# Altium PCB Mako DSP R1.6.PcbDoc (part 2 of 2)
Units mil, origin at the board's own origin, x right, y up, seen from the top; angles counter-clockwise.
Board outline 4440 x 2100 mil, 4 copper layers (Top Layer, GND, Power, Bottom Layer); 190 components, 158 nets, 691 pads, 287 vias.
Unrouted connection lines stored in the file: 35.
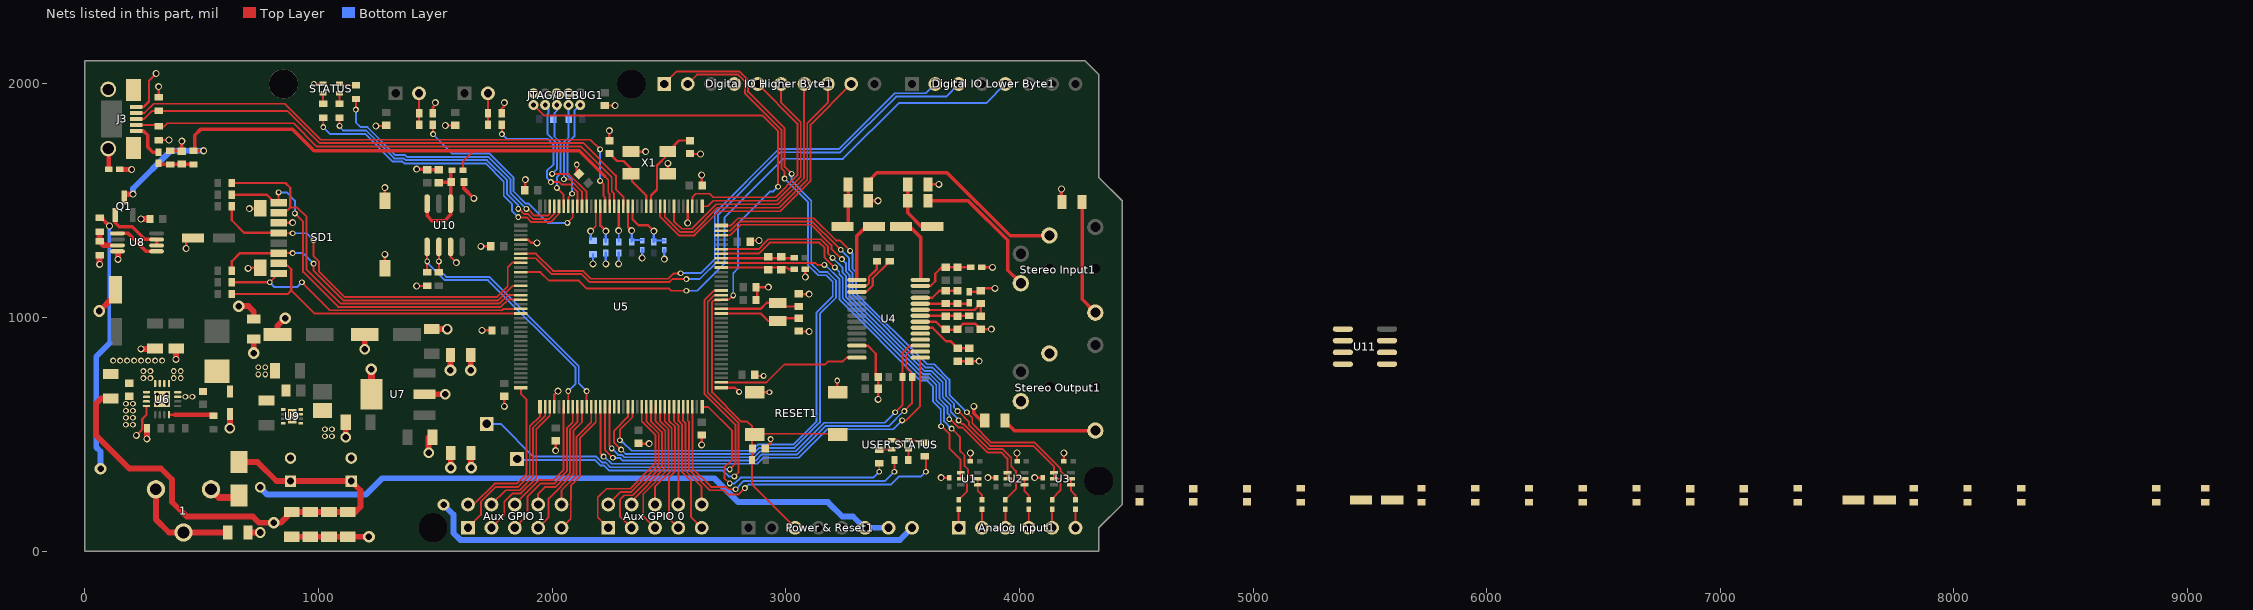
[diagram p4: the nets of this part, all layers, seen from the top]

## Via types
v1: diameter 25, hole 15, Top Layer to Bottom Layer, 131 vias
v2: diameter 30, hole 20, Top Layer to Bottom Layer, 121 vias
v3: diameter 50, hole 28, Top Layer to Bottom Layer, 23 vias
v4: diameter 45, hole 28, Top Layer to Bottom Layer, 10 vias
v5: diameter 19.68, hole 7.87, Top Layer to Bottom Layer, 2 vias

## Nets (pads, with @x,y where several pads share a name; then routed paths per layer and width w, separated by ;. In a path a pad name is that pad's centre, name@x,y a point inside that pad or via, vN(x,y) a via of type N, cw(c..) or ccw(c..) an arc to the next point about the centre after c; other vN are vias at no path point) (continued)
GND: "Digital IO Higher Byte1.4" "Power & Reset1.6" "Power & Reset1.7" "USER STATUS.1" C1.1 C2.1 C3.1 C4.1 C5.1 C6.1 C7.1 C8.1 C9.1 C12.1 C13.1 C16.1 C17.1 C18.1 C19.1 C21.1 C23.1 C24.1 C25.1 C27.1 C28.1 C29.1 C30.2 C31.1 C32.2 C35.1 C36.1 C37.1 C38.1 C39.1 C40.1 C41.1 C42.1 C43.1 C44.1 C45.1 C46.1 C47.1 C48.1 C49.1 C50.1 C51.2 C52.2 C53.2 C54.1 C55.1 C56.2 C57.2 C58.2 C59.1 C60.1 C61.2 C62.1 C63.1 C64.1 C65.2 C66.1 C67.1 C68.1 C71.1 C72.1 C73.1 C74.1 C75.1 C78.1 C79.1 D1.1 FB3.2 FB4.2 FB6.1 FB8.1 FB8.2 FB9.1 FB9.2 FB11.1 FB11.2 FB12.2 FB13.2 FB14.2 FB15.2 FB16.1 FB17.2 J3.5 JTAG/DEBUG1.3 JTAG/DEBUG1.5 JTAG/DEBUG1.9 pad.@850,2000 R8.1 R11.1 R14.1 R16.1 R20.1 R29.2 R31.2 R32.2 R33.2 R47.1 R51.1 R52.2 R57.1 RESET1.2 SD1.6 SD1.9 SD1.10 SD1.11 SD1.12 STATUS.1 U4.12 U4.21 U5.4 U5.40 U5.76 U5.109 U6.4 U6.14 U6.15 U6.17 U7.2 U7.4 U8.4 U9.1 U9.4 U9.5 U9.9 U10.3 U11.4 X1.2 X1.4 | length 8989.1
  Top Layer w10: J3.5@219.04,1901.18 250.22,1901.18 274.04,1925 274.04,2013.78 v2(305,2044.74) ; v2(220.25,496) 245.25,521 245.25,566 263.32,584.07 U6.4@263.32,621.47 ; R32.2@315.57,1943.54 v2(315.57,1988.46) ; R33.2@315.83,1759.74 v2(360,1759.74) ; C68.1@413.03,1714.27 C68.1@415,1712.3 ; v2(433.53,1295.92) 433.53,1320.92 ; v2(699,1210.92) 701.05,1212.97 SD1.11@750.54,1212.97 ; v2(704,1465.92) 747.58,1465.92 SD1.12@750.54,1468.87 ; v2(889,1405.92) SD1.6@829.32,1405.92 ; v1(980,2000) STATUS.1@1019.13,2000 ; v2(1245,1820) C27.1@1287.56,1820 ; SD1.9@1284,1210.92 v2@1284,1271 ; SD1.10@1284,1500.37 v2(1284,1555.92) ; v2(1420,1135) R47.1@1464.53,1135 ; R14.1@1489.53,1875 1489.53,1899.53 1500,1910 v2(1500,1920) ; v2(1542.44,1822.44) C28.1@1585,1822.44 ; U10.3@1565,1302.48 1565,1260 v2(1590,1235) ; v2(1695,1305) C43.1@1737.44,1305 ; v2(1700,945) C42.1@1742.44,945 ; R16.1@1784.53,1875 1784.53,1894.53 1795,1905 v2(1795,1920) ; v2(1795,620) C41.1@1795,662.44 ; U5.40@1865.87,1332.48 1897.52,1332.48 1910,1320 v2(1935,1320) ; C44.1@1885,1547.44 v2(1885,1590) ; U5.76@2009.57,617.91 2009.57,669.57 v2(2025,685) ; v2(2015,430) C40.1@2015,472.44 ; v1(2105,1655) 2105,1625 C46.1@2115.51,1614.49 ; C32.2@2225,1907.44 v2(2270,1907.44) ; C30.2@2245,1757.56 v2(2245,1800) ; X1.2@2337.52,1710 v2(2400,1710) ; C39.1@2372.44,460 v2(2415,460) ; X1.4@2495,1615.51 v2(2495,1660) ; v2@2580.43,1405 U5.4@2580.43,1476.18 ; C31.1@2592.56,1700 v2(2635,1700) ; v2(2640,455) C38.1@2640,507.36 ; C45.1@2640,1567.56 v2(2640,1610) ; U5.109@2724.13,700.2 2781.85,700.2 v1(2800,682.05) ; C47.1@2852.56,1330 v2(2885,1330) ; RESET1.2@2868.39,680 v1(2930,680) ; C37.1@2869.69,750 v1(2905,750) ; C49.1@2877.56,1075 2877.56,1130 v2(2925,1130) ; C29.1@2912.56,440 2935,462.44 v1(2935,480) ; C35.1@3055,940 v2(3100,940) ; C36.1@3060,1102.56 3062.56,1100 v2(3100,1100) ; v2(3083.62,1173.43) FB6.1@3083.62,1207.05 ; RESET1.2@3220,682.72 v1(3220,730) ; U4.12@3304.17,879.84 3350.47,879.84 3385.16,845.16 3385.16,755.28 C8.1@3395.12,745.31 C9.1@3395.12,695.31 v2@3395.12,650.2 ; 3454.13,475 3480,475 3490,465 v1(3490,455) ; U4.21@3575.83,982.2 3642.8,982.2 3677.44,947.56 3727.44,947.56 C13.1@3735,940 ; C23.1@3613.31,1570 v2(3655,1570) ; v2(3665,315) 3699.69,315 C2.1@3700,314.68 ; C18.1@3735,813.44 C19.1@3785,813.44 v2(3827.56,813.44) ; C13.1@3735,950 3757.81,972.81 3812.19,972.81 C17.1@3835,950 v2(3880,950) ; FB17.2@3785,1111.18 3831.06,1111.18 C16.1@3835,1115.12 3845.04,1125.16 v2(3895.16,1125.16) ; v2(3790,420) 3790,385.32 C1.1@3790.31,385 ; FB13.2@3838.78,1215.16 v2(3885.16,1215.16) ; v2(3865,315) 3899.69,315 C4.1@3900,314.68 ; v2(3990,420) 3990,385.32 C3.1@3990.31,385 ; v2(4065,315) 4099.69,315 C6.1@4100,314.68 ; FB14.2@4180,1496.69 FB14.2@4181.69,1495 ; v2(4190,420) 4190,385.32 C5.1@4190.31,385 ; SD1.6@829.28,1405.88 SD1.6@829.32,1405.92
  Top Layer w15: R29.2@365,1714.27 C68.1@413.03,1714.27 ; C68.1@415,1712.3 v2(415,1754.74) ; v2(1420,1635) C62.1@1462.56,1635 ; C62.1@1465,1632.56 C63.1@1515,1632.56 ; C64.1@1622.56,1580 1622.56,1552.44 v2(1665,1510) ; C21.1@3353.31,1500 v2(3395,1500) ; v2(3805,620) 3805,590 3835,560 FB15.2@3851.69,560 ; FB14.2@4180,1496.69 v2(4180,1550)
  Top Layer w20: FB12.2@149.2,1634.02 v2(200,1634.01)
  Top Layer w25: v3(62,1028) 119,1085 C66.1@119,1119.55 ; v2(63,1228) R20.1@63,1267.47 ; v2@141,1249.94 U8.4@141,1278 ; v2(240,1422) C65.2@278.44,1422 ; v2(240.25,866) 298.4,866 C53.2@300.25,867.85 ; v2(265.25,481) 265.72,481.47 R11.1@265.72,526 ; v2(390.25,821) C50.1@390.25,867.85 ; v4(621,527) D1.1@621,586.77 ; v3(658,1049) 700,1049 723,1026 FB11.2@723,994.31 ; FB16.1@698.31,80 v4(750,80) ; v3(723,848) FB11.1@723,907.69 ; C61.2@788,927 C61.2@817.45,927 ; C61.2@824.45,928 824.45,964.45 v3(857,997) ; C74.1@885,61.85 C7.1@965,61.85 C72.1@1045,61.85 C73.1@1125,61.85 v3(1215.85,61.85) ; v4(1116.3,488.4) C67.1@1116.3,552 ; C58.2@1197.45,925 1198,924.45 v4(1198,865) ; v3@1225.83,778.83 v3(1226,779) ; U7.2@1454.17,672 v4(1542.45,672) ; C56.2@1470.7,487 1471,486.7 v4(1471,422) ; C57.2@1484,951.15 1550.85,951.15 v4(1551,951) ; v3(1564.69,775) FB9.2@1564.69,840 ; v3(1566,357) FB8.2@1566,419.69 ; v3(1651.31,774) FB9.1@1651.31,840 ; FB8.1@1652.31,420 1653,419.31 v3(1653,357)
  Top Layer w30: U7.4@1225.83,679 v3@1225.83,778.83
  Bottom Layer w10: v2(2175,1230) R8.1@2175,1270.47 ; v2(2230,1230) FB3.2@2230,1277.01 ; FB4.2@2283.62,1277.05 FB4.2@2285,1278.43 ; v2(2285,1230) FB4.2@2285,1276.38 ; v2(2385,1255) C25.1@2385,1292.36 ; v2(2480,1250) C24.1@2480,1290.32
  Bottom Layer w25: v4(750,273) 781,242 1202.32,242 1272.32,312 2694.16,312 2796.13,210.03 3179.97,210.03 3241.97,148.03 3288.03,148.03 3336.06,100 3340,100 3440,100
  other v1: 1027,492 1057,492 1027,522 1057,522 310.25,631 350.25,631 310.25,671 350.25,671 742,757 772,757 742,787 772,787 120.25,816 150.25,816 180.25,816 210.25,816 240.25,816 270.25,816 300.25,816 330.25,816
  other v2: 3395.16,650.16 142,1249 1283.53,1270.92 2580,1405
  other v5: 887,561.25 887,592.75
I2C_CLK: R1.1 U4.17 U5.88 | length 1846.7
  Top Layer w8: U5.88@2245.79,617.91 2245.79,449.21 v1(2255,440) ; v1(3467.72,595) 3499.69,626.96 R1.1@3499.69,745.16 3499.69,849.68 3529.84,879.84 U4.17@3575.83,879.84
  Bottom Layer w8: v1(2255,440) 2282.5,412.5 2297.7,412.5 2308.2,402 2865.58,402 2891.58,428 3043,428 3165,550 3422.72,550 v1(3467.72,595)
I2C_DATA: R2.1 U4.16 U5.87 | length 1890.4
  Top Layer w8: U5.87@2226.1,617.91 2226.1,433.9 v1(2260,400) ; v1(3507.72,600) 3540.16,632.44 R2.1@3540.16,745.16 ; R2.1@3535.16,755.16 3535.16,765.16 3515.69,784.63 3515.69,840.68 3529.25,854.25 U4.16@3575.83,854.25
  Bottom Layer w8: v1(2260,400) 2261.5,398.5 2291.9,398.5 2302.4,388 2871.38,388 2897.38,414 3048.8,414 3170.8,536 3441.9,536 3505.9,600 v1(3507.72,600)
LATCH_ENABLE: U4.15 U5.86 | length 1897.3
  Top Layer w8: U5.86@2206.42,617.91 2206.42,418.58 v1(2220,405) ; v1(3497.72,560) 3515,560 3575.16,620.16 3575.16,827.99 U4.15@3575.83,828.66
  Bottom Layer w8: v1(2220,405) 2223.18,405 2254.18,374 2877.18,374 2903.18,400 3054.6,400 3176.6,522 3459.72,522 v1(3497.72,560)
MODE: U4.14 U5.110 | length 633.3
  Top Layer w8: U5.110@2715,722.05 2917.05,722.05 2994.05,799.05 3169.05,799.05 3182.5,812.5 3244.32,812.5 3260.48,828.66 U4.14@3304.17,828.66
Net1_1: 1.1 D2.2 | length 139.9
  Top Layer w8: D2.2@646.85,230 D2.2@660,243.15
  Top Layer w30: 1.1@540,265 575,230 D2.2@646.85,230
Net1_2: 1.2 1.3 FB16.2 | length 460
  Top Layer w25: 1.2@303.78,265 303.78,136.22 360.04,79.96 1.3@421.89,79.96 FB16.2@611.69,80 FB16.2@611.69,80
"NetAnalog Input1_1": "Analog Input1.1" R34.1 | length 80.3
  Top Layer w8: 3740,100 R34.1@3740,180.32
"NetAnalog Input1_2": "Analog Input1.2" R35.1 | length 80.3
  Top Layer w8: 3840,100 R35.1@3840,180.32
"NetAnalog Input1_3": "Analog Input1.3" R36.1 | length 80.3
  Top Layer w8: 3940,100 R36.1@3940,180.32
"NetAnalog Input1_4": "Analog Input1.4" R37.1 | length 80.3
  Top Layer w8: 4040,100 R37.1@4040,180.32
"NetAnalog Input1_5": "Analog Input1.5" R38.1 | length 80.3
  Top Layer w8: 4140,100 R38.1@4140,180.32
"NetAnalog Input1_6": "Analog Input1.6" R39.1 | length 80.3
  Top Layer w8: 4240,100 R39.1@4240,180.32
"NetAux GPIO 0_1": "Aux GPIO 0.1" U5.95 | length 722.2
  Top Layer w8: 2240,100 2195,145 2195,230 2232.53,267.53 2333.53,267.53 2442,375.99 2442,498 2383.58,556.42 U5.95@2383.58,617.91
"NetAux GPIO 0_2": "Aux GPIO 0.2" U5.96 | length 556.1
  Top Layer w8: 2240,200 2293.53,253.53 2339.33,253.53 2456,370.2 2456,503.8 2403.27,556.53 U5.96@2403.27,617.91
"NetAux GPIO 0_3": "Aux GPIO 0.3" U5.97 | length 653.5
  Top Layer w8: 2340,100 2290,150 2290,220 2309.53,239.53 2345.13,239.53 2470,364.4 2470,509.6 2423,556.6 U5.97@2422.95,617.91 U5.97@2422.95,617.91
"NetAux GPIO 0_4": "Aux GPIO 0.4" U5.98 | length 494.7
  Top Layer w8: 2340,200 2340,214.6 2484,358.6 2484,515.4 2442.64,556.76 U5.98@2442.64,617.91
"NetAux GPIO 0_5": "Aux GPIO 0.5" U5.99 | length 598.1
  Top Layer w8: 2440,100 2390,150 2390,244.8 2498,352.8 2498,521.2 2462.32,556.87 U5.99@2462.32,617.91
"NetAux GPIO 0_6": "Aux GPIO 0.6" U5.100 | length 460.2
  Top Layer w8: 2440,200 2440,275 2512,347 2512,526.99 2482.01,556.99 U5.100@2482.01,617.91
"NetAux GPIO 0_7": "Aux GPIO 0.7" U5.101 | length 556
  Top Layer w8: U5.101@2500,617.91 2500,558.79 2526,532.79 2526,341.2 2500,315.2 2500,140 2540,100
"NetAux GPIO 0_8": "Aux GPIO 0.8" U5.102 | length 425.6
  Top Layer w8: U5.102@2521.38,617.91 2521.38,557.21 2540,538.59 2540,200
"NetAux GPIO 0_9": "Aux GPIO 0.9" U5.103 | length 558.9
  Top Layer w8: U5.103@2541.06,617.91 2541.06,557.33 2555,543.39 2555,340 2595,300 2595,145 2640,100
"NetAux GPIO 0_10": "Aux GPIO 0.10" U5.104 | length 450.7
  Top Layer w8: U5.104@2560.75,617.91 2560.75,557.44 2570,548.19 2570,345.4 2640,275.4 2640,200
"NetAux GPIO 1_1": "Aux GPIO 1.1" U5.73 | length 701.6
  Top Layer w8: 1640,100 1695,155 1695,210.9 1759.1,275 1854.8,275 1904,324.2 1904,534 1948.15,578.15 U5.73@1948.15,617.91
"NetAux GPIO 1_2": "Aux GPIO 1.2" U5.72 | length 684
  Top Layer w8: 1640,200 1664.3,200 1753.3,289 1849,289 1890,330 1890,650 1865.87,674.13 U5.72@1865.87,700.2
"NetAux GPIO 1_3": "Aux GPIO 1.3" U5.75 | length 642.1
  Top Layer w8: 1740,100 1795,155 1795,210.9 1831.1,247 1866.4,247 1932,312.6 1932,522.4 1989.88,580.28 U5.75@1989.88,617.91
"NetAux GPIO 1_4": "Aux GPIO 1.4" U5.74 | length 548.2
  Top Layer w8: 1740,200 1801,261 1860.6,261 1918,318.4 1918,528.2 1970.2,580.4 U5.74@1970.2,617.91
"NetAux GPIO 1_5": "Aux GPIO 1.5" U5.80 | length 656.4
  Top Layer w8: 1840,100 1895,155 1895,235.2 1948.8,289 2009.6,289 2062.94,342.33 2062.94,527.13 2088.31,552.5 U5.80@2088.31,617.91
"NetAux GPIO 1_6": "Aux GPIO 1.6" U5.78 | length 540.5
  Top Layer w8: 1840,200 1840,200.8 1944.2,305 2005.8,305 2048.94,348.13 U5.78@2048.94,617.91
"NetAux GPIO 1_7": "Aux GPIO 1.7" U5.82 | length 595.7
  Top Layer w8: 1940,100 1985,145 1985,224.8 2090.94,330.74 2090.94,515.53 2127.68,552.28 U5.82@2127.68,617.91
"NetAux GPIO 1_8": "Aux GPIO 1.8" U5.81 | length 514.1
  Top Layer w8: 1940,200 1940,245 1970,275 2015.4,275 2076.94,336.53 2076.94,521.33 2107.99,552.39 U5.81@2107.99,617.91
"NetAux GPIO 1_9": "Aux GPIO 1.9" U5.85 | length 578.7
  Top Layer w8: 2040,100 2079.53,139.53 2079.53,219.53 2080,220 2080,280.2 2118.94,319.14 2118.94,484.14 2186.73,551.93 U5.85@2186.73,617.91
"NetAux GPIO 1_10": "Aux GPIO 1.10" U5.84 | length 470.5
  Top Layer w8: 2040,200 2040,260 2104.94,324.94 2104.94,489.94 2167.05,552.05 U5.84@2167.05,617.91
NetC10_1: C10.1 C11.1 FB13.1 U4.27 | length 260.6
  Top Layer w10: U4.27@3575.83,1135.75 3620.56,1135.75 3640,1155.19 3640,1187.56 C10.1@3675,1222.56 ; C10.1@3685,1215.12 3685.04,1215.16 FB13.1@3791.54,1215.16
NetC12_2: C12.2 C13.2 R3.1 U4.22 | length 209.5
  Top Layer w10: U4.22@3575.83,1007.8 3784.29,1007.8 R3.1@3785,1007.09
NetC14_1: C14.1 C15.1 FB17.1 U4.24 | length 209.2
  Top Layer w10: U4.24@3575.83,1058.98 FB17.1@3785,1058.98
NetC14_2: C14.2 C15.2 U4.25 | length 171.8
  Top Layer w10: U4.25@3575.83,1084.57 3627.01,1084.57 3657.56,1115.12 C15.2@3735,1115.12
NetC16_2: C16.2 C17.2 U4.23 | length 325.8
  Top Layer w10: U4.23@3575.83,1033.39 3576.65,1032.56 3807.56,1032.56 C16.2@3835,1060 C17.2@3835,1005.12
NetC18_2: C18.2 C19.2 U4.20 | length 245.6
  Top Layer w10: U4.20@3575.83,956.61 3628.39,956.61 3687,898 3706.56,898 C18.2@3736,868.56 C19.2@3785,868.56
NetC20_1: C20.1 U4.1 | length 277.5
  Top Layer w15: U4.1@3304.17,1161.34 3304.17,1349.17 3345,1390 C20.1@3376.93,1390
NetC20_2: C20.2 C21.2 R4.1 | length 181.5
  Top Layer w15: C20.2@3263.07,1390 3266.69,1393.62 C21.2@3266.69,1500 R4.1@3266.69,1570
NetC22_1: C22.1 U4.28 | length 286.9
  Top Layer w15: C22.1@3493.07,1390 3530,1390 3578.66,1341.34 3578.66,1164.17 U4.28@3575.83,1161.34
NetC22_2: C22.2 C23.2 R5.1 | length 251.1
  Top Layer w15: C23.2@3521.69,1570 3521.69,1448.31 3580,1390 C22.2@3626.93,1390
NetC24_2: C24.2 FB2.2 U5.16 | length 261.1
  Top Layer w10: U5.16@2344.21,1476.18 2344.21,1420.79 2370,1395 2410,1395 v2(2435,1370)
  Bottom Layer w10: v2(2435,1370) FB2.2@2435,1323.62 2441.06,1329.69 C24.2@2480,1329.69
NetC25_2: C25.2 FB1.2 U5.17 | length 195.9
  Top Layer w10: U5.17@2324.53,1476.18 2324.53,1387.52 v2(2340,1372.05)
  Bottom Layer w10: FB1.2@2340,1325.67 v2(2340,1372.05) ; FB1.2@2346.06,1331.73 C25.2@2385,1331.73
NetC30_1: C30.1 U5.13 X1.3 | length 306.3
  Top Layer w10: C30.1@2245,1702.44 2277.44,1670 2305,1670 2337.52,1637.48 X1.3@2337.52,1615.51 ; X1.3@2341.54,1615.51 2341.54,1583.46 2403.27,1521.73 U5.13@2403.27,1476.18
NetC31_2: C31.2 U5.12 X1.1 | length 378.4
  Top Layer w10: U5.12@2422.95,1476.18 2422.95,1522.95 2448.57,1548.57 2448.57,1650.34 2495,1696.77 X1.1@2495,1710 2542.56,1757.56 C31.2@2590,1757.56
NetC63_2: C63.2 C64.2 FB7.1 U10.6 U10.8 | length 417.3
  Top Layer w8: FB7.1@1565,1623.62 FB7.1@1571.38,1630
  Top Layer w15: U10.8@1465,1487.52 1465,1435 1485,1415 1540,1415 1565,1440 U10.6@1565,1487.52 C64.2@1565,1580 ; C63.2@1515,1577.44 1517.56,1580 C64.2@1565,1580 ; FB7.1@1565,1623.62 C64.2@1565,1580 ; C64.2@1567.44,1580 C64.2@1565,1580
NetC68_2: C68.2 FB10.1 R27.1 R29.1 | length 152.4
  Top Layer w10: FB10.1@315,1661.12 FB10.1@320.91,1655.21
  Top Layer w15: FB10.1@320.91,1655.21 R29.1@365,1655.21 R27.1@465,1655.21
NetC69_1: C69.1 U4.19 | length 1.4
  Top Layer w15: U4.19@3575.83,931.02 U4.19@3576.85,930
NetC69_2: C69.2 R49.2 R51.2
NetC70_1: C70.1 R46.2 R48.1 U11.1
NetC70_2: C70.2 R49.1 R50.2
NetC75_2: C75.2 R50.1 U11.3
NetC76_1: C76.1 U4.18
NetC76_2: C76.2 R55.2 R57.2
NetC77_1: C77.1 R53.2 R54.1 U11.7
NetC77_2: C77.2 R55.1 R56.2
NetC78_2: C78.2 R56.1 U11.5
NetDBGEN1_2: DBGEN1.2 R15.2 R16.2 | length 134.5
  Top Layer w8: R15.2@1725,1825.47 DBGEN1.2@1725,1960
NetFB3_1: FB3.1 U5.23 | length 162.3
  Top Layer w10: U5.23@2206.42,1476.18 2206.42,1393.58 v2(2230,1370)
  Bottom Layer w10: FB3.1@2230,1323.62 v2(2230,1370)
NetFB4_1: FB4.1 U5.19 | length 150.6
  Top Layer w8: U5.19@2285,1476.02 U5.19@2285.16,1476.18
  Top Layer w10: v2(2285,1372.05) U5.19@2285,1476.02
  Bottom Layer w8: FB4.1@2285,1325.67 v2(2285,1372.05)
NetFB7_2: FB7.2 Q1.3 R27.2 U5.21 | length 2625.7
  Top Layer w8: FB7.2@1618.62,1630 1618.62,1668.89 1664,1714.27 ; 2225,1605 2240,1590 2240,1535 2245.79,1529.21 U5.21@2245.79,1476.18
  Top Layer w15: R27.2@465,1714.27 R27.2@470,1714.27 ; v2(508,1714) 507.73,1714.27 R27.2@470,1714.27 ; 2225,1605 2115.73,1714.27 1664,1714.27 980.73,1714.27 890,1805 495,1805 470,1780 R27.2@470,1714.27
  Top Layer w25: Q1.3@171,1528 v2(206,1528)
  Bottom Layer w25: v2(206,1528) 206,1552.12 367.88,1714 v2(508,1714)
NetFB10_2: FB10.2 J3.1 | length 162.7
  Top Layer w15: J3.1@219.04,1798.82 250.22,1798.82 269.04,1780 269.04,1730 290.68,1708.36 FB10.2@315,1708.36
NetFB12_1: FB12.1 J3.6 J3.7 J3.8 J3.9 | length 89.8
  Top Layer w8: J3.7@99.94,1723.03 J3.7@101.95,1721.02
  Top Layer w20: FB12.1@101.95,1634.02 J3.7@101.95,1721.02
NetFB14_1: "Stereo Input1.5" FB14.1 | length 493.3
  Top Layer w15: FB14.1@4268.31,1495 4268.31,1077.72 4315,1031.02 4325,1031.02
NetFB15_1: "Stereo Output1.5" FB15.1 | length 423.5
  Top Layer w15: FB15.1@3938.31,545 3944.15,550.85 3978.98,516.02 4345,516.02
NetJ3_4: J3.4 U5.22 | length 2335.6
  Top Layer w8: J3.4@219.04,1875.59 254.63,1875.59 294.04,1915 479.29,1915 855.25,1915 1008.99,1761.27 2163.73,1761.27 v1(2205,1720) ; v1(2205,1585) 2220,1570 2220,1520 2226.1,1513.9 U5.22@2226.1,1476.18
  Bottom Layer w8: v1(2205,1585) v1(2205,1720)
NetL3_1: L3.1 U9.7
NetQ1_1: Q1.1 U8.6 U8.7 | length 265.1
  Top Layer w15: Q1.1@130.6,1439.6 130.6,1405.4 147,1389 202,1389 256.2,1334.8 U8.7@306.66,1334.8 U8.6@306.66,1309.2
NetR4_2: "Stereo Input1.4" R4.2 | length 920
  Top Layer w15: R4.2@3353.31,1570 3353.31,1583.31 3390,1620 3690,1620 3960,1350 4116.42,1350 4128.15,1361.73
NetR5_2: "Stereo Input1.1" R5.2 | length 627.7
  Top Layer w15: R5.2@3608.31,1500 R5.2@3613.31,1500 ; R5.2@3613.31,1486.69 R5.2@3613.31,1500 ; 4006.1,1157.01 3996.1,1157.01 3950,1203.11 3950,1330.3 3781.3,1499 3614.31,1499 R5.2@3613.31,1500
NetR6_2: R6.2 U4.2 | length 164.6
  Top Layer w10: U4.2@3304.17,1135.75 3345.75,1135.75 3356.51,1146.51 3356.51,1174.61 3390,1208.1 R6.2@3390,1240.47
NetR7_2: R7.2 U4.3 | length 212.7
  Top Layer w10: U4.3@3304.17,1110.16 3345.16,1110.16 3372.51,1137.51 3372.51,1167.98 R7.2@3445,1240.47
NetR8_2: R8.2 U5.24 | length 150.7
  Top Layer w8: v2(2165,1370) 2186.73,1391.73 U5.24@2186.73,1476.18
  Bottom Layer w10: R8.2@2165,1334.53 v2(2165,1370)
NetR13_2: R13.2 R14.2 TRST1.2 | length 134.5
  Top Layer w8: R13.2@1430,1825.47 TRST1.2@1430,1960
NetR15_1: R15.1 U5.28 | length 650.4
  Top Layer w8: R15.1@1784.53,1825 1785,1824.53 v1(1785,1785) ; v1(1995,1580) 2030,1580 2040.45,1569.55 2077.27,1569.55 2107.99,1538.83 U5.28@2107.99,1476.18
  Bottom Layer w8: v1(1785,1785) 1805,1765 1980.4,1765 2005,1740.4 2005,1655 1977.5,1627.5 1977.5,1597.5 v1(1995,1580)
NetR19_1: R19.1 R20.2 U8.3 | length 88.1
  Top Layer w25: R19.1@63,1367.47 R20.2@63,1326.53 80.32,1309.2 103,1309.2
NetR21_1: R21.1 U9.8
NetR23_2: R23.2 STATUS.3 | length 46.1
  Top Layer w8: R23.2@1090,1914.53 STATUS.3@1090,1960.63
NetR24_1: R24.1 STATUS.4 | length 46.5
  Top Layer w8: STATUS.4@1019.13,1960.63 1019.13,1915.39 R24.1@1020,1914.53
NetR25_2: R25.2 STATUS.2 | length 72.3
  Top Layer w8: STATUS.2@1090,2000 1095.47,1994.53 R25.2@1160,1994.53
NetR26_2: "USER STATUS.3" R26.2 | length 45.8
  Top Layer w8: R26.2@3524.53,390 3524.53,435.16 3525,435.63
NetR28_1: "USER STATUS.4" R28.1 | length 54.6
  Top Layer w8: R28.1@3400,434.53 3401.1,435.63 3454.13,435.63
NetR30_2: "USER STATUS.2" R30.2 | length 74.3
  Top Layer w8: 3525,475 3555,475 3565.47,464.53 R30.2@3595,464.53
NetR31_1: R31.1 R46.1 U11.2
NetR34_2: R34.2 U1.1 U1.2 U5.136 | length 1745.8
  Top Layer w8: U5.136@2724.13,1234.05 2724.33,1233.86 3126.14,1233.86 3135,1225 v1(3165,1225) ; v1(3665,535) 3668.18,535 3700,503.18 3700,440 3748.58,391.42 U1.1@3748.58,335.59 U1.2@3748.58,310 3761.07,310 3775.31,295.76 3775.31,255 R34.2@3740,219.69
  Bottom Layer w8: v1(3165,1225) 3168.18,1225 3230,1163.18 3230,1076.01 3576.01,730 3605.67,730 3630,705.67 3630,641.01 3663.5,607.51 3663.5,536.5 v1(3665,535)
NetR35_2: R35.2 U1.4 U1.5 U5.138 | length 1847.2
  Top Layer w8: U5.138@2724.13,1273.43 2883.58,1273.43 2924,1313.85 2924,1314 2931,1321 3144,1321 3165,1300 3165,1258.18 3208.18,1215 v1(3210,1215) ; 3720,515 3745,490 3745,430 3765,410 3765,365 3780,350 3780,330 3800,310 U1.5@3821.42,310 U1.4@3821.42,284.41 3821.42,258.58 3840,240 R35.2@3840,219.69
  Bottom Layer w8: v1(3210,1215) 3229,1196 3229,1186 3244,1171 3244,1081.8 3581.8,744 3611.47,744 3644,711.47 3644,646.8 3677.5,613.3 3677.5,555.68 3708.18,525 v1(3710,525)
NetR36_2: R36.2 U2.1 U2.2 U5.139 | length 1998.1
  Top Layer w8: U5.139@2724.13,1293.11 2883.47,1293.11 2910,1319.64 2910,1319.8 2925.2,1335 3150,1335 3180,1305 3180,1275 v1(3200,1255) ; v1(3700,565) 3703.18,565 3738.18,530 3755.6,530 3862.6,423 3922,423 3948.58,396.42 U2.1@3948.58,335.59 U2.2@3948.58,310 3965,310 3985,290 3985,265 3940,220 R36.2@3940,219.69
  Bottom Layer w8: v1(3200,1255) 3201.82,1255 3243,1213.82 3243,1192 3258,1177 3258,1087.6 3587.6,758 3617.27,758 3658,717.27 3658,652.6 3692,618.6 3692,591.38 3700,583.38 v1(3700,565)
NetR37_2: R37.2 U2.4 U2.5 U5.142 | length 2034
  Top Layer w8: U5.142@2724.13,1352.17 2762.17,1352.17 2807,1397 3108.4,1397 3195,1310.4 3195,1295 v1(3240,1250) ; v1(3740,560) 3756,544 3761.4,544 3868.4,437 3928,437 3965,400 3965,362.8 3985,342.8 3985,325 4000,310 U2.5@4021.42,310 U2.4@4021.42,284.41 4021.42,258.58 4040,240 R37.2@4040,219.69
  Bottom Layer w8: v1(3240,1250) 3257,1233 3257,1198.2 3272,1183.2 3272,1093.4 3593.4,772 3623.07,772 3672,723.07 3672,658.4 3706,624.4 3706,597.18 3740,563.18 v1(3740,560)
NetR38_2: R38.2 U3.1 U3.2 U5.143 | length 2191.8
  Top Layer w8: U5.143@2724.13,1371.85 2762.05,1371.85 2801.2,1411 3114.2,1411 3210,1315.2 3210,1315 v1(3235,1290) ; v1(3735,600) 3738.18,600 3784,554.18 3784,541.2 3874.2,451 4059,451 4148.58,361.42 U3.1@4148.58,335.59 U3.2@4148.58,310 4170,310 4175.31,304.68 4175.31,260.32 4140,225 R38.2@4140,219.69
  Bottom Layer w8: v1(3235,1290) 3271,1254 3271,1204 3286,1189 3286,1099.2 3599.2,786 3628.87,786 3686,728.87 3686,664.2 3720,630.2 3720,615 v1(3735,600)
NetR39_2: R39.2 U3.4 U3.5 U5.144 | length 2219.6
  Top Layer w8: U5.144@2724.13,1393.9 2764.3,1393.9 2795.4,1425 3120,1425 3215,1330 3230,1330 v1(3275,1285) ; v1(3775,595) 3798,572 3798,547 3880,465 4065,465 4175.31,354.68 4175.31,343.93 4209.24,310 U3.5@4221.42,310 U3.4@4221.42,284.41 4221.42,258.58 4240,240 R39.2@4240,219.69
  Bottom Layer w8: v1(3275,1285) 3285,1275 3285,1210 3300,1195 3300,1105 3605,800 3634.66,800 3700,734.66 3700,670 v1(3775,595)
NetR40_2: R40.2 SD1.1 U5.55 | length 1360.1
  Top Layer w8: v1(929,1151) 1048.48,1031.52 1785.92,1031.52 1791.6,1037.2 U5.55@1865.87,1037.2
  Top Layer w10: R40.2@628.53,1150.92 v1(790.85,1150.92) SD1.1@829.28,1189.35
  Bottom Layer w10: v1(790.85,1150.92) 810.85,1130.92 908.92,1130.92 v1(929,1151)
NetR41_2: R41.2 SD1.2 U5.56 | length 1439.7
  Top Layer w8: 883.53,1115.92 901.53,1097.92 ; 901.81,1098 982.29,1017.52 U5.56@1865.87,1017.52
  Top Layer w10: R41.2@628.53,1100.92 868.53,1100.92 883.53,1115.92 883.53,1206.39 857.27,1232.65 SD1.2@829.28,1232.65
NetR42_2: R42.2 SD1.3 U5.50 | length 1419
  Top Layer w8: SD1.3@829.31,1276 v1(889,1276) ; v1(979,1231) 979,1200.45 1105.93,1073.52 1768.52,1073.52 1830.63,1135.63 U5.50@1865.87,1135.63
  Top Layer w10: R42.2@628.53,1200.92 628.53,1240.45 664.04,1275.96 SD1.3@829.28,1275.96
  Bottom Layer w8: v1(889,1276) 934,1276 v1(979,1231)
NetR43_2: R43.2 SD1.5 U5.45 | length 1602.7
  Top Layer w8: SD1.5@830.85,1361 v1(889,1361) ; v1(979,1331) 979,1262.82 1001.5,1240.32 1001.5,1197.95 1111.93,1087.52 1762.52,1087.52 1810,1135 1810,1215 1830,1235 U5.45@1865,1235
  Top Layer w10: R43.2@628.53,1475.92 628.53,1416.39 682.35,1362.57 SD1.5@829.28,1362.57
  Bottom Layer w8: v1(889,1361) 949,1361 v1(979,1331)
NetR44_2: R44.2 SD1.7 U5.52 | length 1707.1
  Top Layer w8: 879,1470.92 909.08,1470.92 949,1431 949,1205.45 1094.93,1059.52 1774.32,1059.52 1811.06,1096.26 U5.52@1865.87,1096.26
  Top Layer w10: R44.2@628.53,1575.92 859,1575.92 879,1555.92 879,1470.92 857.27,1449.19 SD1.7@829.28,1449.19
NetR45_2: R45.2 SD1.8 U5.53 | length 1643.9
  Top Layer w8: SD1.8@829,1492.77 v1(829,1536) ; v1@906.5,1438.5 934,1411 934,1195.45 1083.93,1045.52 1780.12,1045.52 1811.17,1076.57 U5.53@1865.87,1076.57
  Top Layer w10: R45.2@628.53,1525.92 779.08,1525.92 SD1.8@814,1491
  Bottom Layer w8: v1(829,1536) 864,1536 899,1501 v1(899,1446)
NetR48_2: "Stereo Output1.1" R48.2
NetR52_1: R52.1 R53.1 U11.6
NetR54_2: "Stereo Output1.4" R54.2
NetRTCALARM1_1: RTCALARM1.1 U5.129 | length 1840.9
  Top Layer w8: U5.129@2724.13,1096.26 2694.52,1096.26 2666,1067.74 2666,678.8 2798,546.8 2798,338 v1(2780,320)
  Bottom Layer w8: RTCALARM1.1@1850,395 1854,391 2182.38,391 2207.38,366 2222.58,366 2243.58,345 2730,345 2755,320 v1(2780,320)
NetU5_89: U5.89
NetU5_90: U5.90
NetU5_130: U5.130 WAKEUP1.1 | length 1998.6
  Top Layer w8: U5.130@2724.13,1115.94 2694.41,1115.94 2652,1073.54 2652,673 2784,541 2784,374 v1(2760,350)
  Bottom Layer w8: WAKEUP1.1@1720,545 1780,545 1920,405 2188.18,405 2213.18,380 2228.38,380 2249.38,359 2735.8,359 2744.8,350 v1(2760,350)
NetU8_1: U8.1 U8.5 | length 199.1
  Top Layer w15: U8.1@139.34,1360.39 184.61,1360.39 261.39,1283.61 U8.5@306.66,1283.61
PG: R10.2 U6.8 | length 194
  Top Layer w10: U6.8@359.77,584.07 385.25,584.07
  Top Layer w20: 385.25,584.07 R10.2@553.79,584.07
PWM_3: "Digital IO Lower Byte1.5" U5.47 | length 2589.4
  Top Layer w8: U5.47@1865.87,1194.68 1949.71,1194.68 1986.45,1157.94 2114.45,1157.94 2148.4,1124 2501,1124 2510,1115 v1(2575,1115)
  Bottom Layer w8: v1(2575,1115) 2620.6,1115 2738,1232.4 2738,1429.22 2988.28,1679.5 3051.72,1679.5 3052.22,1679 3244.6,1679 3483.6,1918 3858,1918 3940,2000
PWM_5: "Digital IO Lower Byte1.3" U5.44 | length 2383.2
  Top Layer w8: U5.44@1865.87,1253.74 1930.25,1253.74 1998.05,1185.94 2126.05,1185.94 2159.99,1152 2502,1152 2515,1165 v1(2575,1165)
  Bottom Layer w8: v1(2575,1165) 2631.01,1165 2710,1243.99 2710,1440.81 2976.69,1707.5 3063.31,1707.5 3063.81,1707 3233.01,1707 3472.01,1946 3686,1946 3740,2000
PWM_6: "Digital IO Lower Byte1.2" U5.43 | length 2279.8
  Top Layer w8: U5.43@1865.87,1273.43 1930.37,1273.43 2003.85,1199.94 2131.85,1199.94 2165.79,1166 2496.2,1166 2518.37,1188.17 2548.17,1188.17 v1(2550,1190)
  Bottom Layer w8: v1(2550,1190) 2636.21,1190 2696,1249.79 2696,1446.61 2970.89,1721.5 3069.11,1721.5 3069.61,1721 3227.21,1721 3466.21,1960 3600,1960 3640,2000
PWM_9: "Digital IO Higher Byte1.9" U5.10 | length 1304.4
  Top Layer w8: U5.10@2462.32,1476.18 2462.32,1432.27 2542.6,1352 2608.94,1352 2711.94,1455 2976.02,1455 3106,1584.98 3106,1826 3280,2000
PWM_10: "Digital IO Higher Byte1.8" U5.9 | length 1220.1
  Top Layer w8: U5.9@2482.01,1476.18 2482.01,1432.39 2548.4,1366 2603.14,1366 2707.14,1470 2971.22,1470 3092,1590.78 3092,1831.8 3180,1919.8 3180,2000
PWM_11: "Digital IO Higher Byte1.7" U5.7 | length 1127.5
  Top Layer w8: U5.7@2521.38,1476.18 2521.38,1412.82 2554.2,1380 2597.34,1380 2702.34,1485 2966.42,1485 3078,1596.58 3078,1998 3080,2000
PWM_12: "Digital IO Higher Byte1.6" U5.1 | length 906.8
  Top Layer w8: U5.1@2641.85,1476.18 2666.18,1476.18 2690,1500 2961.62,1500 3064,1602.38 3064,1835.8 2980,1919.8 2980,2000
PWM_13: "Digital IO Higher Byte1.5" U5.3 | length 1002
  Top Layer w8: U5.3@2600.12,1476.18 2600.12,1515.12 2615,1530 2675,1530 2690,1515 2956.82,1515 3050,1608.18 3050,1830 2880,2000
RESET: "Power & Reset1.3" C29.2 JTAG/DEBUG1.10 R12.1 RESET1.1 U5.128 | length 3471.6
  Top Layer w8: JTAG/DEBUG1.10@1920,1910 1965,1865 2900,1865 2967,1798 v1(2967,1560) ; v1(2775,1095) 2756.57,1076.57 U5.128@2724.13,1076.57 2719.96,1072.4 2690.46,1072.4 2684.61,1066.54 2684.61,679.99 2809.6,555 2835,555 2855.47,534.53 R12.1@2855.47,390 2855.47,284.53 3040,100 ; RESET1.1@2867.83,499.45 2870.89,502.5 3219.11,502.5 RESET1.1@3222.17,499.45
  Bottom Layer w8: v1(2775,1095) 2775,1190 2795,1210 2795,1401.61 2933.39,1540 2947,1540 v1(2967,1560)
RTCX1: C35.2 U5.125 X2.1 | length 354.5
  Top Layer w10: U5.125@2724.13,1017.52 2892.48,1017.52 2925,985 2970,985 2982.56,997.56 C35.2@3060,997.56
RTCX2: C36.2 U5.126 X2.2 | length 332.6
  Top Layer w10: U5.126@2724.13,1037.2 2892.2,1037.2 2918.82,1063.82 X2.2@2970,1063.82 ; X2.2@2984.33,1047.44 C36.2@3060,1047.44
SHIELD_SCL: "Digital IO Higher Byte1.1" U5.92 | length 3201.2
  Top Layer w8: v1(2295,435) 2265,465 2265,515 2324.53,574.53 U5.92@2324.53,617.91 ; 2480,2000 2534,2054 2801.7,2054 2839,2016.7 2839,1966 2995,1810 2995,1645 v1(3025,1615)
  Bottom Layer w8: v1(2295,435) 2314,416 2575.19,416 2859.78,416 2885.78,442 3036.8,442 3146,551.2 3146,1016 3215,1085 3215,1158.38 3178.38,1195 3144.8,1195 3109,1230.8 3109,1500.8 3025,1584.8 v1(3025,1615)
SHIELD_SDA: "Digital IO Higher Byte1.2" U5.93 | length 3010.1
  Top Layer w8: v1(2290,475) 2290,520.2 2344.21,574.41 U5.93@2344.21,617.91 ; 2580,2000 2620,2040 2795.9,2040 2825,2010.9 2825,1960.2 2981,1804.2 2981,1639 2995,1625 v1(2995,1595)
  Bottom Layer w8: v1(2290,475) 2300,465 2305,465 2340,430 2569.39,430 2853.98,430 2879.98,456 3031,456 3132,557 3132,1021.8 3159.88,1049.68 3159.88,1049.88 3201,1091 3201,1152.58 3172.58,1181 3139,1181 3095,1225 3095,1495 v1(2995,1595)
STATUS_BLUE: R24.2 U5.32 | length 1327.4
  Top Layer w8: v1(1020,1815) R24.2@1020,1855.47 ; v1(1855,1430) 1856.5,1428.5 1891.5,1428.5 1911.35,1408.65 1993.65,1408.65 2029.25,1444.25 U5.32@2029.25,1476.18
  Bottom Layer w8: v1@1020,1810.63 v1@1020,1820.63 ; v1(1020,1815) 1049,1786 1199,1786 1317.5,1667.5 1359.32,1667.5 1366.82,1660 1715,1660 1793,1582 1793,1522.2 1828,1487.2 1828,1457 v1(1855,1430)
STATUS_GREEN: R23.1 U5.33 | length 1212.3
  Top Layer w8: v1(1090,1820) R23.1@1090,1855.47 ; v1(1855,1465) 1858.18,1465 1880.68,1442.5 1897.3,1442.5 1917.15,1422.65 1987.65,1422.65 2009.57,1444.57 U5.33@2009.57,1476.18
  Bottom Layer w8: v1@1090,1825.63 1090,1815.63 1105,1800.63 1204.17,1800.63 1323.3,1681.5 1365.12,1681.5 1372.62,1674 1720.8,1674 1807,1587.8 1807,1528 1855,1480 v1(1855,1465)
STATUS_RED: R25.1 U5.34 | length 1165.1
  Top Layer w8: v1(1160,1890) R25.1@1160,1935.47 ; v1(1890,1465) 1894.6,1465 1922.94,1436.65 1981.65,1436.65 1989.88,1444.88 U5.34@1989.88,1476.18
  Bottom Layer w8: v1(1160,1890) 1160,1835 1180,1815 1209.6,1815 1329.1,1695.5 1370.92,1695.5 1378.42,1688 1726.6,1688 1821,1593.6 1821,1533.8 1889.8,1465 v1(1890,1465)
SW: C26.1 D1.2 L1.1 U6.1 U6.12 U6.13 U6.16
  other v1: 250.25,741 280.25,741 380.25,741 410.25,741 250.25,771 280.25,771 380.25,771 410.25,771
TCK/SWDCLK: JTAG/DEBUG1.4 R18.1 U5.27 | length 488.7
  Top Layer w8: v1(2050,1592.05) 2074.57,1592.05 2127.68,1538.94 U5.27@2127.68,1476.18
  Bottom Layer w8: v1(2050,1592.05) 2050,1750 2070,1770 JTAG/DEBUG1.4@2070,1910
TDI: JTAG/DEBUG1.8 U5.26 | length 569
  Top Layer w8: v1@2000,1614.55 2071.87,1614.55 2147.36,1539.06 U5.26@2147.36,1476.18
  Bottom Layer w8: JTAG/DEBUG1.8@1970,1910 1985,1895 1985,1876.11 1980.75,1871.86 1980.75,1784.45 2020,1745.2 2020,1635 v1(2000,1615)
TDO/SWO: JTAG/DEBUG1.6 R17.1 U5.31 | length 466.5
  Top Layer w8: v1(2020,1555) 2048.94,1526.06 U5.31@2048.94,1476.18
  Bottom Layer w8: v1(2020,1555) 2020,1600 2035,1615 2035,1750 2010,1775 2010,1875 2020,1885 JTAG/DEBUG1.6@2020,1910
TMS/SWDIO: JTAG/DEBUG1.2 U5.30 | length 471.7
  Top Layer w8: U5.30@2068.62,1476.18 2070,1477.56 2070,1515 v1(2085,1530)
  Bottom Layer w8: v1(2085,1530) 2085,1588.87 2065,1608.87 2065,1745.2 2095,1775.2 2095,1885 JTAG/DEBUG1.2@2120,1910
TRST: R13.1 U5.29 | length 887.8
  Top Layer w8: v1@1490,1785.47 R13.1@1490,1825 ; v1(2065,1405) 2088.31,1428.31 U5.29@2088.31,1476.18
  Bottom Layer w8: v1(1490,1785) 1573,1702 1732.4,1702 1835,1599.4 1835,1539.6 1887.1,1487.5 1899.32,1487.5 1981.82,1405 v1(2065,1405)
USB0_N: J3.2 R33.1 U5.20 | length 2268.2
  Top Layer w8: J3.2@219.04,1824.41 309.71,1824.41 R33.1@315.58,1818.54 339.04,1818.54 352.5,1832 893,1832 993.23,1731.77 2122.98,1731.77 2125.48,1729.27 2125.73,1729.27 2255,1600 2255,1541.21 2265.47,1530.74 U5.20@2265.47,1476.18
USB0_P: J3.3 R32.1 U5.18 | length 2327.5
  Top Layer w8: J3.3@219.04,1850 254.04,1850 288.53,1884.49 R32.1@315.57,1884.49 865.97,1884.49 1003.19,1747.27 2133.19,1747.27 2273,1607.46 2273,1548.67 2304.84,1516.83 U5.18@2304.84,1476.18
USB0_PPWR: R47.2 U5.79 U10.1 | length 1114.4
  Top Layer w8: R47.2@1465,1194.53 v1(1465,1240) U10.1@1465,1302.48 ; U5.79@2068.62,617.91 v1(2068.62,685)
  Bottom Layer w8: v1(1465,1240) 1465,1235.2 1540.2,1160 1725.2,1160 2100,785.2 2100,716.38 v1(2068.62,685)
USB0_PPWR_FAULT: R22.2 U5.83 U10.2 | length 1100.3
  Top Layer w8: R22.2@1515,1194.53 v1(1515,1240) U10.2@1515,1302.48 ; U5.83@2147.36,617.91 v1(2147.36,685)
  Bottom Layer w8: v1(1515,1240) 1515,1205 1546,1174 1731,1174 2114,791 2114,718.36 v1(2147.36,685)
USER_STATUS_BLUE: R28.2 U5.108 | length 1114.7
  Top Layer w8: U5.108@2641.85,617.91 2667.09,617.91 2770,515 2770,391.82 2737.5,359.32 2737.5,312.5 v1(2760,290) ; v1(3400,340) R28.2@3400,375.47
  Bottom Layer w8: v1(2760,290) 2781.82,290 2806.82,315 3375,315 v1(3400,340)
USER_STATUS_GREEN: R26.1 U5.106 | length 1246.4
  Top Layer w8: U5.106@2600.12,617.91 2600.12,354.88 2680,275 2743.18,275 2753.18,265 v1(2785,265) ; v1(3465,340) 3465.47,340.47 R26.1@3465.47,390
  Bottom Layer w8: v1(2785,265) 2821,301 3426,301 v1(3465,340)
USER_STATUS_RED: R30.1 U5.105 | length 1437.1
  Top Layer w8: U5.105@2580.43,617.91 2580.43,557.56 2586.12,551.87 2586.12,349.08 2674.2,261 2737.38,261 2755.88,242.5 2797.5,242.5 v1(2825,270) ; R30.1@3595,405.47 3600,400.47 v1(3600,340)
  Bottom Layer w8: v1(2825,270) 2840,285 3450,285 3485,320 3580,320 v1(3600,340)
VDDA: C33.2 C34.2 FB5.2 U5.137 | length 313.6
  Top Layer w10: U5.137@2724.13,1253.74 3033.07,1253.74 FB5.2@3036.38,1257.05
VIN: "Power & Reset1.8" C7.2 C51.1 C52.1 C54.2 C55.2 C72.2 C73.2 C74.2 D2.1 R19.2 U6.2 U6.3 U6.11 | length 5479.7
  Top Layer w15: R19.2@70.47,1426.53 v2(105,1392)
  Top Layer w25: R19.2@63,1426.53 R19.2@70.47,1426.53 ; C55.2@110.25,652.85 68.85,652.85 48.5,632.5 48.5,495.5 190,354 326,354 373,307 373,211 436,148 719,148 745,122 v3(808,122) 838.85,122 C74.2@885,168.15 C7.2@965,168.15 C72.2@1045,168.15 C73.2@1125,168.15 1158.15,168.15 1180,190 1180,260 C51.1@1140,300 C52.1@880,300 820,300 738.15,381.85 D2.1@660,381.85
  Bottom Layer w15: 105,890 v2(105,1392)
  Bottom Layer w25: v3(67,353) 67,426.41 48.5,444.91 48.5,833.5 105,890 ; v3(1535,199) 1577,157 1577,77.78 1606.28,48.5 3488.5,48.5 3540,100
  other v1: 175.25,541 205.25,541 175.25,571 205.25,571 175.25,601 205.25,601 175.25,631 205.25,631 430.25,660.84 460.25,661
VSSA: C33.1 C34.1 FB6.2 U5.135 | length 315.3
  Top Layer w10: U5.135@2724.13,1214.37 3005.63,1214.37 3012.95,1207.05 FB6.2@3036.38,1207.05
pads on no net: "Power & Reset1.1" "Stereo Input1.3" "Stereo Input1.6" "Stereo Input1." "Stereo Output1.3" "Stereo Output1.6" "Stereo Output1." C79.2 J3.GND JTAG/DEBUG1.1@2195.59,1991.5 JTAG/DEBUG1.7 U5.2 U5.6 U5.8 U5.15 U5.35 U5.37 U5.38 U5.39 U5.54 U5.57 U5.58 U5.60 U5.61 U5.62 U5.63 U5.64 U5.65 U5.66 U5.67 U5.68 U5.69 U5.70 U5.91 U5.115 U5.117 U5.121 U5.122 U5.123 U5.124 U5.132 U5.133 U5.134 U5.140 U6.6 U6.7 U6.9 U10.4 U10.5

## Polygon pours and split planes (outlines as drawn)
SW on Top Layer "Mechanical 15-No Net" (solid, pour order 10): 355.25,676 355.25,736 365.25,736 365.25,791 510.25,791 510.25,821 620.25,821 620,713 651,713 651,652 621,652 621,666 480.25,666 480.25,686 420.25,686 420.25,676
DVDD on Top Layer "Power Plane-No Net" (solid, remove dead copper, pour order 32): 889,811 889,723 897,723 897,657 972,657 972,646 1063,646 1063,959 943,959 943,811
5VCC on Top Layer "Power Plane-No Net" (solid, remove dead copper, pour order 26): 739,569 739,500 831,500 831,563 862,563 862,594 819,594 819,576 812,569
GND on Top Layer "Top Layer-No Net" (solid, remove dead copper, pour order 28): 742,622 819,622 819,601 857.49,601 858,601.51 858,613 838,613 835,616 835,732 836,733 836,807 722,807 722,745 742,725
GND on Top Layer "Power Plane-No Net" (solid, remove dead copper, pour order 35): 858,613 858,556 838,556 838,474 1077,474 1077,542 910,542 910,613
NetL3_1 on Top Layer "Power Plane-No Net" (solid, remove dead copper, pour order 41): 1063,635 1063,552 947,552 947,572 907,572 907,600 948,600 948,635
NetR21_1 on Top Layer "Power Plane-No Net" (solid, remove dead copper, pour order 38): 897,722 832,722 832,627 867,627 867,597 942,597 942,657 897,657 897,722
5VCC on Top Layer "Mechanical 15-No Net" (solid, pour order 18): 262.75,1011 262.75,941 442.75,941 447.75,941 452.75,936 452.75,891 682.75,891 682.75,1011
VIN on Top Layer "Mechanical 15-No Net" (solid, remove dead copper, pour order 8): 375.25,671 375.25,651 410.25,651 410.25,641 475.25,641 475.25,681 410.25,681 410.25,671
GND on Top Layer "Mechanical 15-No Net" (solid, pour order 16): 315.25,691 345.25,691 345.25,831 70.25,831 70.25,736 160.25,736 160.25,701 225.25,701 225.25,796 315.25,796
SW on Top Layer "Mechanical 15-No Net" (solid, pour order 12): 230.25,676 295.25,676 295.25,691 305.25,691 305.25,791 230.25,791
VIN on Top Layer "Mechanical 15-No Net" (solid, pour order 6): 285.25,666 285.25,636 225.25,636 225.25,526 75.25,526 75.25,691 160.25,691 160.25,681 225.25,681 225.25,666
NetFB12_1 on Top Layer "Power Plane-No Net" (solid, remove dead copper, pour order 23): 59.04,1675 59.04,2025 244.04,2025 244.04,1675
VIN on Bottom Layer "Mechanical 15-No Net" (solid, pour order 2): 160.25,649.21 220.25,649.21 220.25,601 410.25,601 410.25,676 475.25,676 475.25,526 160.25,526
SW on Bottom Layer "Mechanical 15-No Net" (solid, pour order 4): 430.25,711 230.25,711 230.25,791 430.25,791
GND on GND (split plane): 296.4,989.4 298.05,988.29 300,987.9 1530.89,987.9 1603.9,914.89 1603.9,20.1 20.1,20.1 20.1,1084.9 200.89,1084.9
GND on GND (split plane): 4319.9,2031.68 4319.9,1600 4320.29,1596.08 4321.43,1592.31 4323.29,1588.83 4325.79,1585.79 4419.9,1491.68 4419.9,208.32 4325.79,114.21 4323.29,111.17 4321.43,107.69 4320.29,103.92 4319.9,100 4319.9,20.1 1614.1,20.1 1614.1,917 1613.71,918.95 1612.6,920.6 1536.6,996.6 1534.95,997.71 1533,998.1 302.11,998.1 206.6,1093.6 204.95,1094.71 203,1095.1 20.1,1095.1 20.1,2079.9 4271.68,2079.9
no net on Power (split plane): 2124.39,1989.98 2129.02,1988.86 2133.42,1987.04 2137.48,1984.55 2141.1,1981.46 2144.2,1977.84 2146.69,1973.78 2148.51,1969.38 2149.62,1964.75 2149.99,1960 2149.62,1955.25 2148.51,1950.62 2146.69,1946.22 2144.2,1942.16 2141.1,1938.54 2137.48,1935.45 2133.42,1932.96 2129.02,1931.14 2124.39,1930.02 2119.64,1929.65 2114.9,1930.02 2110.27,1931.14 2105.87,1932.96 2101.81,1935.45 2098.18,1938.54 2095.09,1942.16 2092.6,1946.22 2090.78,1950.62 2089.67,1955.25 2089.3,1960 2089.67,1964.75 2090.78,1969.38 2092.6,1973.78 2095.09,1977.84 2098.18,1981.46 2101.81,1984.55 2105.87,1987.04 2110.27,1988.86 2114.9,1989.98 2119.64,1990.35
no net on Power (split plane): 1174.9,264.31 1105.1,264.31 1105.1,334.11 1174.9,334.11
no net on Power (split plane): 971.2,564.85 975.5,563.82 979.59,562.13 983.36,559.82 986.73,556.94 989.6,553.58 991.91,549.8 993.61,545.71 994.64,541.41 994.99,537 994.64,532.59 993.61,528.29 991.91,524.2 989.6,520.42 986.73,517.06 983.36,514.18 979.59,511.87 975.5,510.18 971.2,509.15 966.79,508.8 962.37,509.15 958.07,510.18 953.98,511.87 950.21,514.18 946.84,517.06 943.97,520.42 941.66,524.2 939.96,528.29 938.93,532.59 938.58,537 938.93,541.41 939.96,545.71 941.66,549.8 943.97,553.58 946.84,556.94 950.21,559.82 953.98,562.13 958.07,563.82 962.37,564.85 966.79,565.2
AVDD on Power (split plane): 4319.9,2031.68 4319.9,1600 4320.29,1596.08 4321.43,1592.31 4323.29,1588.83 4325.79,1585.79 4419.9,1491.68 4419.9,208.32 4325.79,114.21 4323.29,111.17 4321.43,107.69 4320.29,103.92 4319.9,100 4319.9,20.1 1596.1,20.1 1596.1,217 1595.71,218.95 1594.6,220.6 1356.6,458.6 1354.95,459.71 1353,460.1 1260.1,460.1 1260.1,897.9 1437.65,897.9 1666.4,669.15 2019.44,316.11 2020.04,315.71 2019.9,315 2020.29,313.05 2021.4,311.4 2023.05,310.29 2025,309.9 3255,309.9 3256.95,310.29 3258.6,311.4 3269.1,321.9 3288.6,341.4 3288.61,341.4 3443.6,496.4 3444.71,498.05 3445.1,500 3445.1,1267.89 3483.6,1306.4 3484.71,1308.05 3485.1,1310 3485.1,2079.9 4271.68,2079.9
no net on Power (split plane): 3444.88,137.09 3449.68,136.13 3454.31,134.56 3458.7,132.39 3462.77,129.68 3466.45,126.45 3469.68,122.77 3472.4,118.7 3474.56,114.31 3476.13,109.68 3477.09,104.88 3477.41,100 3477.09,95.12 3476.13,90.32 3474.56,85.69 3472.4,81.3 3469.68,77.23 3466.45,73.55 3462.77,70.32 3458.7,67.61 3454.31,65.44 3449.68,63.87 3444.88,62.91 3440,62.59 3435.12,62.91 3430.32,63.87 3425.69,65.44 3421.3,67.61 3417.23,70.32 3413.55,73.55 3410.32,77.23 3407.6,81.3 3405.44,85.69 3403.87,90.32 3402.91,95.12 3402.59,100 3402.91,104.88 3403.87,109.68 3405.44,114.31 3407.6,118.7 3410.32,122.77 3413.55,126.45 3417.23,129.68 3421.3,132.39 3425.69,134.56 3430.32,136.13 3435.12,137.09 3440,137.41
no net on Power (split plane): 3344.96,137.67 3349.83,136.7 3354.54,135.1 3359,132.9 3363.13,130.14 3366.86,126.87 3370.14,123.13 3372.9,119 3375.1,114.54 3376.7,109.83 3377.67,104.96 3377.99,100 3377.67,95.04 3376.7,90.17 3375.1,85.46 3372.9,81 3370.14,76.87 3366.86,73.13 3363.13,69.86 3359,67.1 3354.54,64.9 3349.83,63.3 3344.96,62.33 3340,62.01 3335.04,62.33 3330.17,63.3 3325.46,64.9 3321,67.1 3316.87,69.86 3313.14,73.13 3309.86,76.87 3307.1,81 3304.9,85.46 3303.3,90.17 3302.33,95.04 3302.01,100 3302.33,104.96 3303.3,109.83 3304.9,114.54 3307.1,119 3309.86,123.13 3313.14,126.87 3316.87,130.14 3321,132.9 3325.46,135.1 3330.17,136.7 3335.04,137.67 3340,137.99
DVDD on Power (split plane): 3474.9,1312.11 3436.4,1273.6 3435.29,1271.95 3434.9,1270 3434.9,502.11 3281.4,348.61 3281.4,348.6 3261.9,329.11 3261.9,329.1 3252.89,320.1 2028.07,320.1 2027.76,321.66 2026.65,323.31 1673.61,676.36 1673.6,676.36 1443.36,906.6 1441.71,907.71 1439.76,908.1 1255,908.1 1253.05,907.71 1251.4,906.6 1250.29,904.95 1249.9,903 1249.9,460.1 434.1,460.1 434.1,999 433.71,1000.95 432.6,1002.6 426.1,1009.11 426.1,1568.89 463.6,1606.4 463.61,1606.4 543.6,1686.4 544.71,1688.05 545.1,1690 545.1,2079.9 3474.9,2079.9
no net on Power (split plane): 971.47,789.05 976.27,787.9 980.83,786.01 985.04,783.44 988.79,780.23 991.99,776.48 994.57,772.27 996.46,767.72 997.61,762.92 998,758 997.61,753.08 996.46,748.28 994.57,743.73 991.99,739.52 988.79,735.77 985.04,732.56 980.83,729.99 976.27,728.1 971.47,726.95 966.56,726.56 961.64,726.95 956.84,728.1 952.28,729.99 948.07,732.56 944.32,735.77 941.12,739.52 938.54,743.73 936.65,748.28 935.5,753.08 935.11,758 935.5,762.92 936.65,767.72 938.54,772.27 941.12,776.48 944.32,780.23 948.07,783.44 952.28,786.01 956.84,787.9 961.64,789.05 966.56,789.44
5VCC on Power (split plane): 534.9,1692.11 456.4,1613.61 456.4,1613.6 417.4,1574.6 416.29,1572.95 415.9,1571 415.9,1007 416.29,1005.05 417.4,1003.4 423.9,996.89 423.9,460.1 20.1,460.1 20.1,2079.9 534.9,2079.9
VIN on Power (split plane): 1585.9,214.89 1585.9,20.1 20.1,20.1 20.1,449.9 424.39,449.9 425.4,448.4 427.05,447.29 429,446.9 430.95,447.29 432.6,448.4 433.61,449.9 1350.89,449.9
no net on Power (split plane): 914.9,264.31 845.1,264.31 845.1,334.11 914.9,334.11

## Keep-outs
Keep-Out Layer:
  lines w10: 25,25 25,2075 4270,2075 4315,2030 4315,1590 4415,1490 4415,215 4315,115 4315,25 25,25

## Other copper
GND (plane layer: these items are gaps in the copper):
  lines w10: -10,1090 203,1090 300,993 1533,993 1609,917 1609,0
Power (plane layer: these items are gaps in the copper):
  circle w10: c3440,100 r42.43
  circle w10: c3340,100 r43.01
  circle w10: c2119.64,1960 r35.36
  circle w10: c966.79,537 r33.21
  circle w10: c966.56,758 r36.44
  lines w10: -5,455 1353,455 1591,217 1591,0 ; 429,452 429,999 421,1007 421,1571 460,1610 540,1690 540,2100 940,2100 ; 1255,455 1255,903 1439.76,903 1670,672.76 2023.05,319.71 ; 2025,315 3255,315 3265.5,325.5 3285,345 3440,500 3440,1270 3480,1310 3480,2094 ; 840,259.21 840,339.21 920,339.21 920,259.21 840,259.21 ; 1100,259.21 1180,259.21 1180,339.21 1100,339.21 1100,259.21

## Silkscreen, mask and mechanical layers (free items; w line width, h text height)
Top Overlay:
  lines w10: 3690,445 4275,445
  text "Designed By" at 3725,1735 h75
  text "Mako DSP" at 3165,1700 h135
  text "Adam J. Vadala-Roth" at 3725,1675 h75
  text "Prototype R1.6" at 3165,1650 h75
  text "www.MakoDSP.com" at 3725,1625 h75
  text "Analog Inputs" at 3685,465 h78.74
Bottom Overlay:
  region: 2263 vertices and 0 holes, not listed, extent 657.18,88.57 1823,1139.99
  text "r" at 2180,560 h250
Mechanical 15:
  circle w5: c2340,2000 r62.5
  circle w5: c4340,300 r62.5
  lines w5: 0,0 4340,0 4340,100 4440,200 4440,1500 4340,1600 4340,2040 4280,2100 0,2100 0,0

## Text inside footprints (layer, text, board x,y; h text height)
C51: Top Overlay "+" at 1230,279.21 h59.06 r90
C52: Top Overlay "+" at 970,279.21 h59.06 r90
"Digital IO Higher Byte1": Top Overlay "SCL" at 2505,1815 h78.74 r90; Top Overlay "SDA" at 2595,1810 h78.74 r90; Top Overlay "AREF" at 2700,1770 h78.74 r90; Top Overlay "GND" at 2805,1805 h78.74 r90; Top Overlay "~ 13" at 2905,1800 h78.74 r90; Top Overlay "12" at 3005,1855 h78.74 r90; Top Overlay "~ 11" at 3100,1795 h78.74 r90; Top Overlay "~ 10" at 3205,1795 h78.74 r90; Top Overlay "~ 9" at 3305,1835 h78.74 r90; Top Overlay "8" at 3405,1890 h78.74 r90
"Digital IO Lower Byte1": Top Overlay "7" at 3565,1895 h78.74 r90; Top Overlay "~ 6" at 3665,1835 h78.74 r90; Top Overlay "~ 5" at 3765,1835 h78.74 r90; Top Overlay "4" at 3865,1890 h78.74 r90; Top Overlay "~ 3" at 3965,1835 h78.74 r90; Top Overlay "2" at 4065,1890 h78.74 r90; Top Overlay "TX 1" at 4160,1790 h78.74 r90; Top Overlay "RX 0" at 4265,1785 h78.74 r90
"Power & Reset1": Top Overlay "IOREF" at 2965,170 h78.74 r90; Top Overlay "RESET" at 3060,170 h78.74 r90; Top Overlay "3.3V" at 3165,170 h78.74 r90; Top Overlay "5V" at 3260,170 h78.74 r90; Top Overlay "GND" at 3360,170 h78.74 r90; Top Overlay "GND" at 3465,170 h78.74 r90; Top Overlay "VIN" at 3565,170 h78.74 r90